# EAGLE board TempPCB v41 (EAGLE 9.7.0)
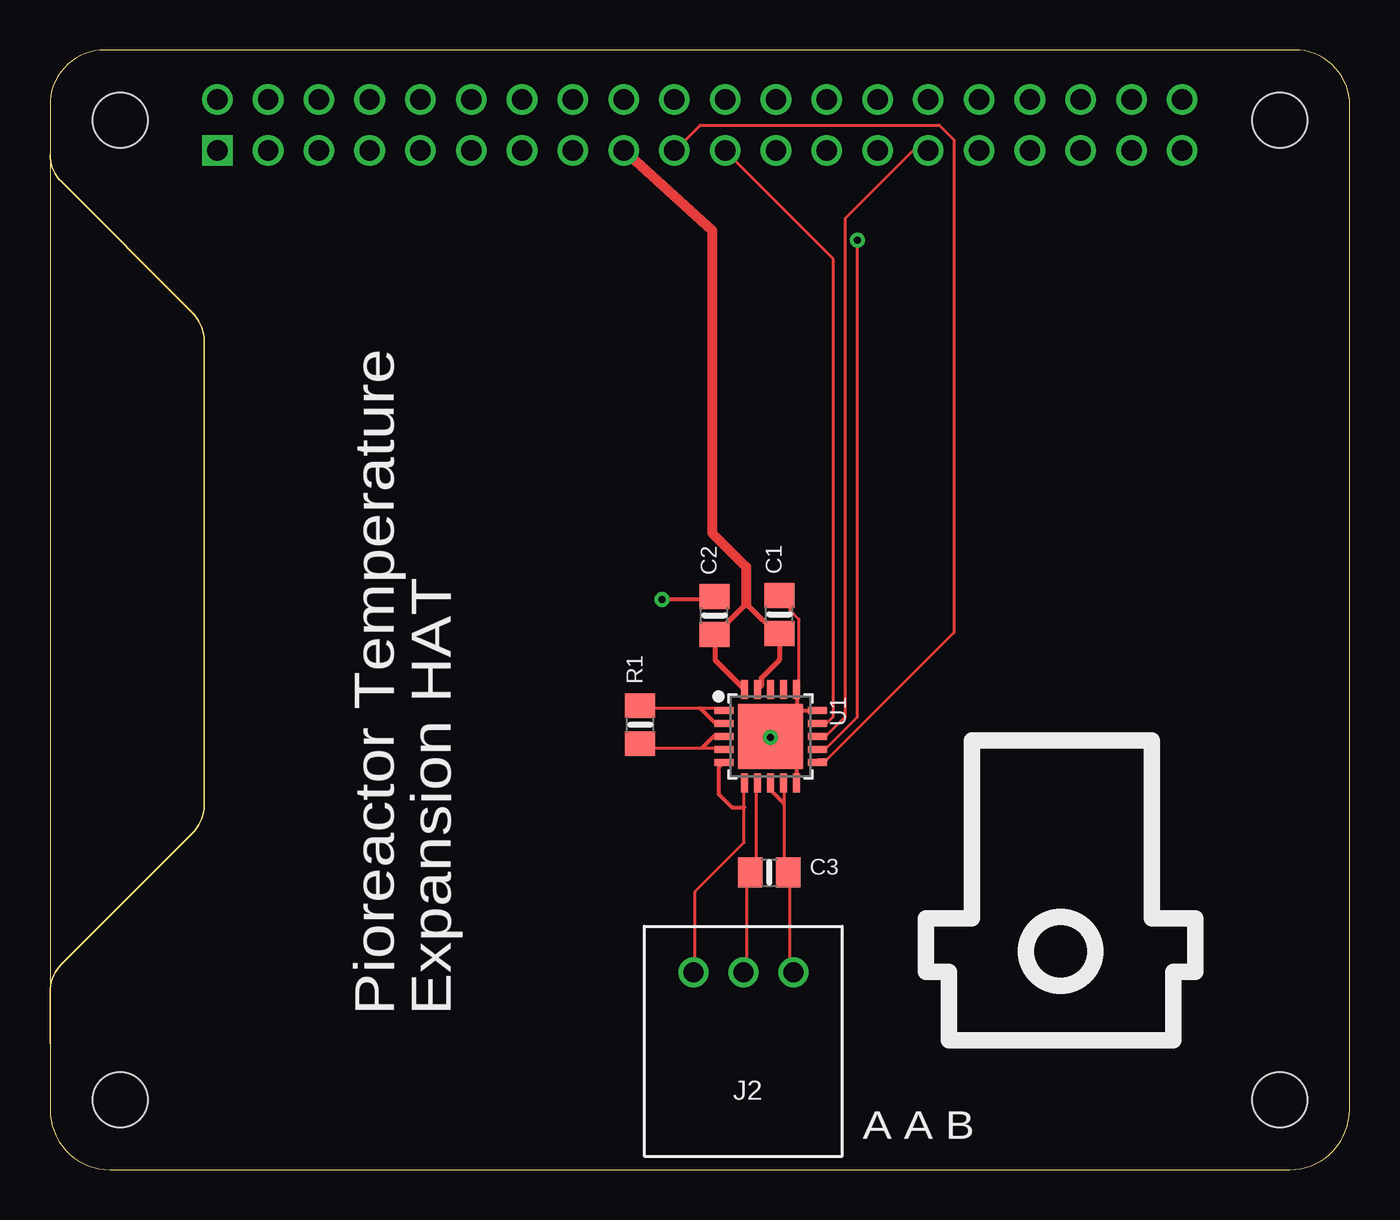
[diagram p0: board, top side]
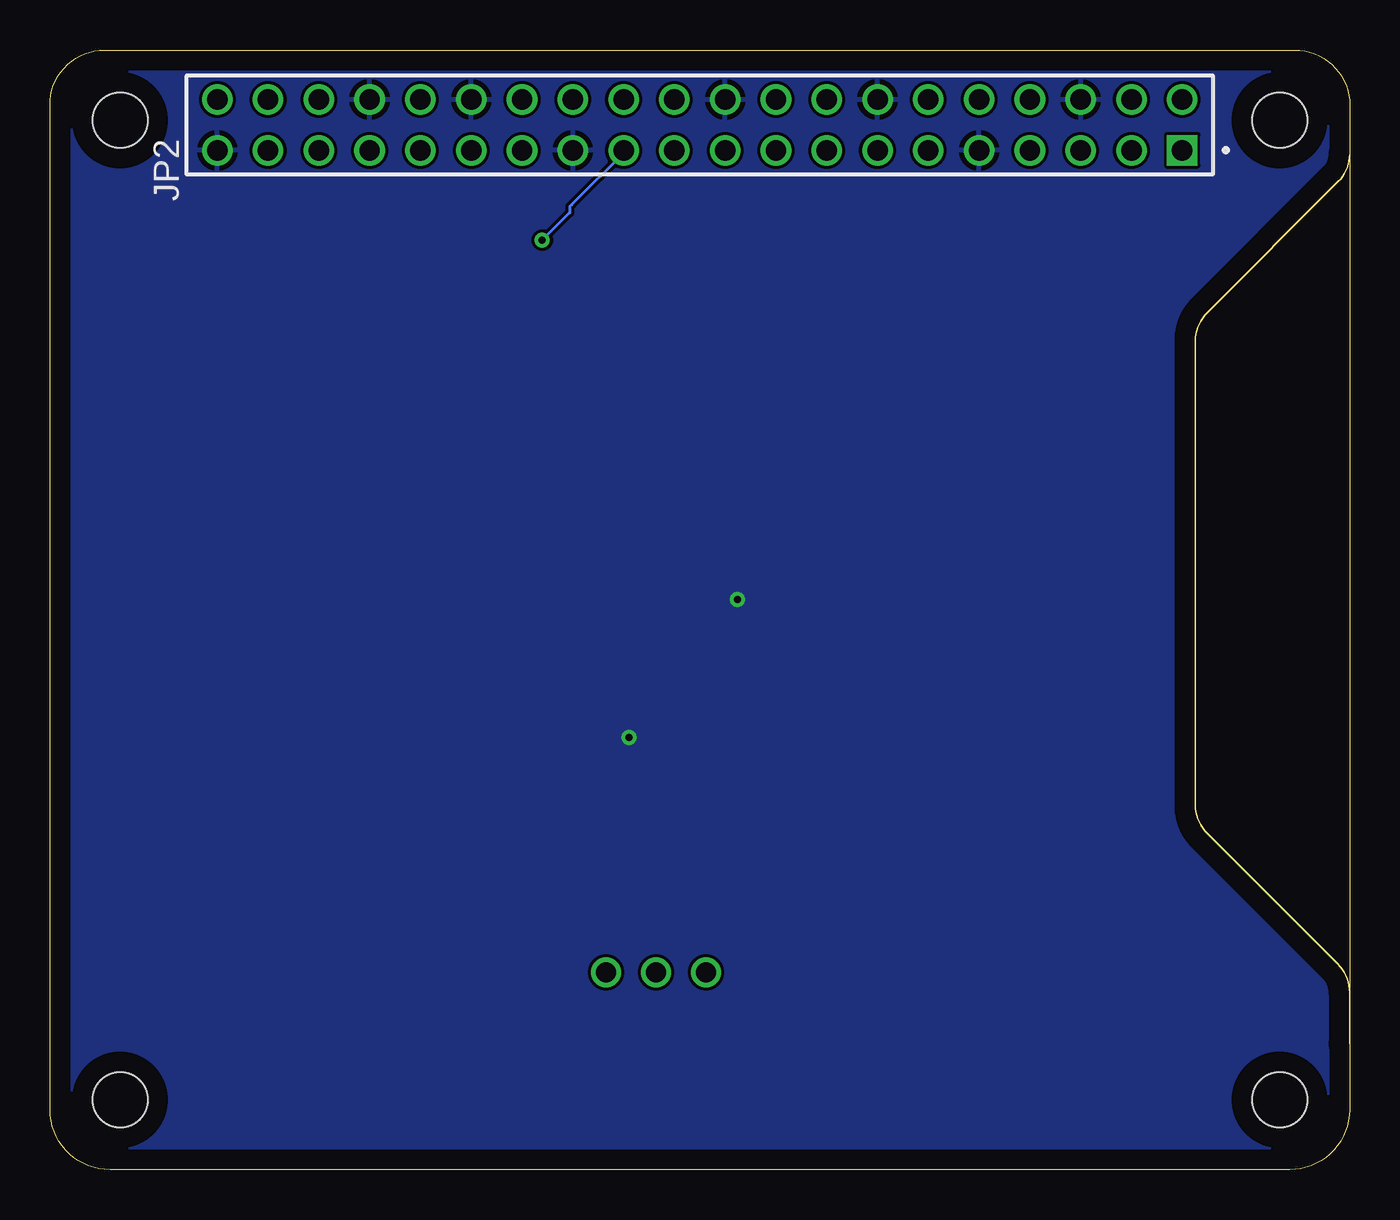
[diagram p1: board, bottom side, seen from below]

Size 65 x 56.01 mm. Coordinates in mm from the lower left corner, seen from the top.
Outline: 0,50.78 0,53.5 arc-90 3,56 62,56 arc-90 65,53.5 65,3 arc-90 62,0 3,0 arc-90 0,3 0,6.31
Outline: 0,50.78 0,6.31
Outline: 0,50.78 arc45 0.56,49.44 7.12,42.87 arc-45 7.71,41.45 7.71,18.24 arc-45 7.12,16.83 0.59,10.29 arc45 0,8.87 0,6.31
Copper layers (1*16): Top 0.035mm / dielectric 1.5mm / Bottom 0.035mm
Design rules "Fusion Electronics Design Rules": minimum track width 0.1529mm, minimum drill 0.35mm, track to track 0.153mm, track to pad 0.153mm, pad to pad 6mil, via to via 6mil, smd to smd 6mil, copper to edge 40mil, drill to drill 6mil, minimum pad ring 10mil, minimum via ring 8mil, stop-mask expansion 4mil, vias tented up to drill 0mil, thermal gap 10mil
Holes 2.75 mm at 3.5,52.5 3.5,3.5 61.5,3.5 61.5,52.5

## Footprints (pad centres in the part's own frame; a part is rotated, then mirrored left to right if it is on the bottom)
0805-NO = smd 1.24 x 1.5: 1 -0.95,0; 2 0.95,0
S3B-XH-A = drill 1: 1 0,0; 2 2.5,0; 3 5,0
SAMTEC_SSQ-120-03-T-D = drill 1.02 pad 1.37 square: 01 24.13,-1.27 | drill 1.02 pad 1.37: 02 24.13,1.27; 03 21.59,-1.27; 04 21.59,1.27; 05 19.05,-1.27; 06 19.05,1.27; 07 16.51,-1.27; 08 16.51,1.27; 09 13.97,-1.27; 10 13.97,1.27; 11 11.43,-1.27; 12 11.43,1.27; 13 8.89,-1.27; 14 8.89,1.27; 15 6.35,-1.27; 16 6.35,1.27; 17 3.81,-1.27; 18 3.81,1.27; 19 1.27,-1.27; 20 1.27,1.27; 21 -1.27,-1.27; 22 -1.27,1.27; 23 -3.81,-1.27; 24 -3.81,1.27; 25 -6.35,-1.27; 26 -6.35,1.27; 27 -8.89,-1.27; 28 -8.89,1.27; 29 -11.43,-1.27; 30 -11.43,1.27; 31 -13.97,-1.27; 32 -13.97,1.27; 33 -16.51,-1.27; 34 -16.51,1.27; 35 -19.05,-1.27; 36 -19.05,1.27; 37 -21.59,-1.27; 38 -21.59,1.27; 39 -24.13,-1.27; 40 -24.13,1.27
QFN20_4MM_0.65MM = smd 0.35 x 0.95: 1 -1.3,-2.34; 2 -0.65,-2.34; 3 0,-2.34; 4 0.65,-2.34; 5 1.3,-2.34; 11 1.3,2.34; 12 0.65,2.34; 13 0,2.34; 14 -0.65,2.34; 15 -1.3,2.34 | smd 0.95 x 0.35: 6 2.34,-1.3; 7 2.34,-0.65; 8 2.34,0; 9 2.34,0.65; 10 2.34,1.3; 16 -2.34,1.3; 17 -2.34,0.65; 18 -2.34,0; 19 -2.34,-0.65; 20 -2.34,-1.3 | smd 3.25 x 3.25: PAD 0,0

## Placement (x,y rotation side)
C1  0.1uF  [0805-NO]  36.48,27.78 90 top
C2  0.1uF  [0805-NO]  33.23,27.73 90 top
C3  10nF  [0805-NO]  35.97,14.87 0 top
J2  3A/250V  [S3B-XH-A]  32.19,9.88 0 top
JP2  [SAMTEC_SSQ-120-03-T-D]  32.5,52.26 0 bottom
R1  4300Ω 0.1%  [0805-NO]  29.52,22.26 90 top
U1  MAX31865  [QFN20_4MM_0.65MM]  36.04,21.68 270 top

## Library data of the parts
C1-C3 R1 U1 = microbuilder
J2 = Library; CATEGORY: Header; DESCRIPTION: Connector Header Through Hole, Right Angle 3 position 0.098" (2.50mm); MANUFACTURER: JST Sales America Inc.; MPN: S3B-XH-A(LF)(SN); OPERATING_TEMPERATURE: -25°C ~ 85°C; PART_STATUS: Active; PITCH: 0.098" (2.50mm); ROHS_COMPLIANCE: ROHS3 Compliant; SERIES: XH; SUBCATEGORY: Rectangular Connectors; TYPE: Header, Male Pin, Board to Cable/Wire, Through Hole
JP2 = SnapEDA Library; MANUFACTURER: Samtec Inc.; PARTREV: R; STANDARD: Manufacturer Recommendations

## Nets
CS: JP2.29 U1.13
FORCE+: J2.1 U1.5 U1.6
GND: C1.2 C2.2 JP2.06 JP2.09 JP2.14 JP2.20 JP2.25 JP2.30 JP2.34 JP2.39 U1.10 U1.15 U1.16 U1.PAD
N$1: R1.1 U1.3 U1.4
N$2: R1.2 U1.1 U1.2
RTDIN+: C3.1 J2.2 U1.7
RTDIN-: C3.2 J2.3 U1.8 U1.9
SCLK: JP2.23 U1.12
SDI: JP2.19 U1.11
SDO: JP2.21 U1.14
VDD: C1.1 C2.1 JP2.17 U1.19 U1.20

## Tracks (layer width: path | path; a pad name or v marks a point on that pad's centre or on a via)
CS
  Top 0.153: 38.7,21.72 38.42,21.72 U1.13 38.7,21.72 | 38.7,21.72 38.85,21.72 39.77,22.64 39.77,47.56 43.19,50.99 JP2.29
FORCE+
  Top 0.153: U1.6 34.72,19.27 34.72,18.13 34.72,16.37 32.27,13.92 32.27,9.94 J2.1
  Top 0.2: U1.5 33.45,20.12 33.45,18.8 34.12,18.13 34.72,18.13
GND  (via drill 0.35)
  Top 0.153: C2.2 33.12,28.61 | U1.PAD 37.17,22.64 37.12,22.64 | U1.PAD 36.1,21.57 37.32,20.34 37.34,20.34 | C1.2 37.01,28.45 37.01,27.99 37.47,27.53 37.47,24.17 U1.16 | U1.PAD 36.1,21.72 v36.04,21.63
  Top 0.2: 37.34,20.34 U1.10 | v30.62,28.52 30.63,28.53 33.12,28.53 33.12,28.61 | 37.12,22.64 37.12,22.98 37.35,22.98 | 37.35,22.98 U1.15 | U1.16 37.35,24.02 37.35,22.98
  pour Bottom: 3,0.08 62,0.08 62.42,0.11 62.82,0.19 63.21,0.34 63.58,0.54 63.91,0.79 64.21,1.09 64.46,1.42 64.66,1.79 64.81,2.18 64.89,2.58 64.92,3 64.92,53.49 64.86,53.87 64.75,54.24 64.58,54.58 64.37,54.9 64.11,55.18 63.82,55.43 63.49,55.63 63.14,55.78 62.77,55.88 62.39,55.93 62.02,55.92 62.02,55.92 62,55.92 61.99,55.92 61.99,55.92 3.01,55.92 3.01,55.92 3,55.92 2.98,55.92 2.98,55.92 2.61,55.93 2.23,55.88 1.86,55.78 1.51,55.63 1.18,55.43 0.89,55.18 0.63,54.9 0.42,54.58 0.25,54.24 0.14,53.87 0.08,53.49 0.08,3 0.11,2.58 0.19,2.18 0.34,1.79 0.54,1.42 0.79,1.09 1.09,0.79 1.42,0.54 1.79,0.34 2.18,0.19 2.58,0.11
N$1
  Top 0.153: U1.4 33.65,21.11 32.62,21.11 29.82,21.11 29.67,21.26 R1.1
  Top 0.2: U1.3 33.19,21.68 32.62,21.11
N$2
  Top 0.153: U1.1 33.65,23.09 32.51,23.09 29.67,23.09 R1.2
  Top 0.2: 32.51,23.09 33.27,22.33 U1.2
RTDIN+
  Top 0.153: U1.7 35.33,19.27 35.33,15.29 35.03,14.99 C3.1 34.87,14.84 34.87,10.1 34.72,9.94 J2.2
RTDIN-
  Top 0.153: U1.9 36.71,19.27 36.71,18.32 36.71,15.14 36.86,14.99 C3.2 37.01,14.84 37.01,10.1 37.17,9.94 J2.3
  Top 0.2: 36.71,18.32 36.04,18.99 U1.8
SCLK  (via drill 0.35)
  Top 0.153: 38.85,21.11 38.39,21.11 U1.12 38.85,21.11 | 38.85,21.11 40.38,22.64 v40.38,46.5
  Bottom 0.153: 38.91,48.27 | 38.91,48.27 36.24,50.93 JP2.23 | v40.38,46.5 39,47.87 39,48.18 38.91,48.27
SDI
  Top 0.153: 38.85,20.5 38.39,20.5 U1.11 38.85,20.5 | 38.85,20.5 45.22,26.87 45.22,51.52 44.48,52.26 32.53,52.26 31.36,51.09 JP2.19
SDO
  Top 0.153: 38.7,22.33 38.71,22.33 38.85,22.33 39.16,22.64 39.16,45.58 33.8,50.93 JP2.21 | 38.7,22.33 U1.14 38.7,22.33
VDD
  Top 0.153: 33.27,26.62 33.24,26.73 C2.1
  Top 0.2: C1.1 36.48,26.66 | 33.26,26.62 33.27,26.62 | 34.82,28.33 34.82,28.3
  Top 0.254: 33.26,26.62 33.26,25.5 U1.20 | 34.82,28.3 33.24,26.73 | 34.82,28.33 36.48,26.66 36.48,25.51 35.59,24.61 35.59,24.21 U1.19
  Top 0.508: JP2.17 33.12,46.99 33.12,31.85 34.82,30.16 34.82,28.33

## Text on the board
tNames: Pioreactor Temperature / Expansion HAT | A A B